# Altium PCB main.PcbDoc
Units mm, origin at the board's own origin, x right, y up, seen from the top; angles counter-clockwise.
Board outline 96.77 x 33.91 mm, 2 copper layers (Top Layer, Bottom Layer); 10 components, 2 nets, 44 pads, 0 vias.
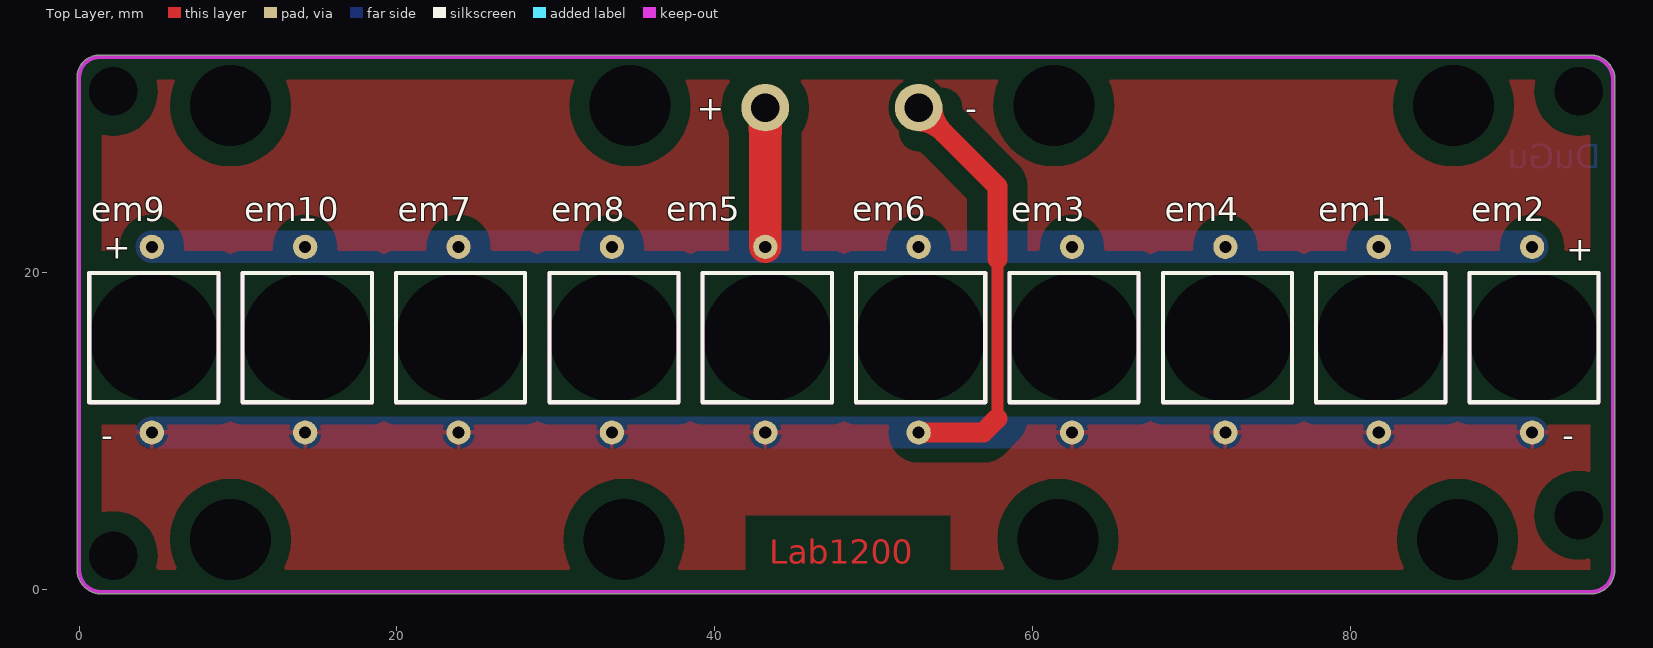
[diagram p0: Top Layer view]
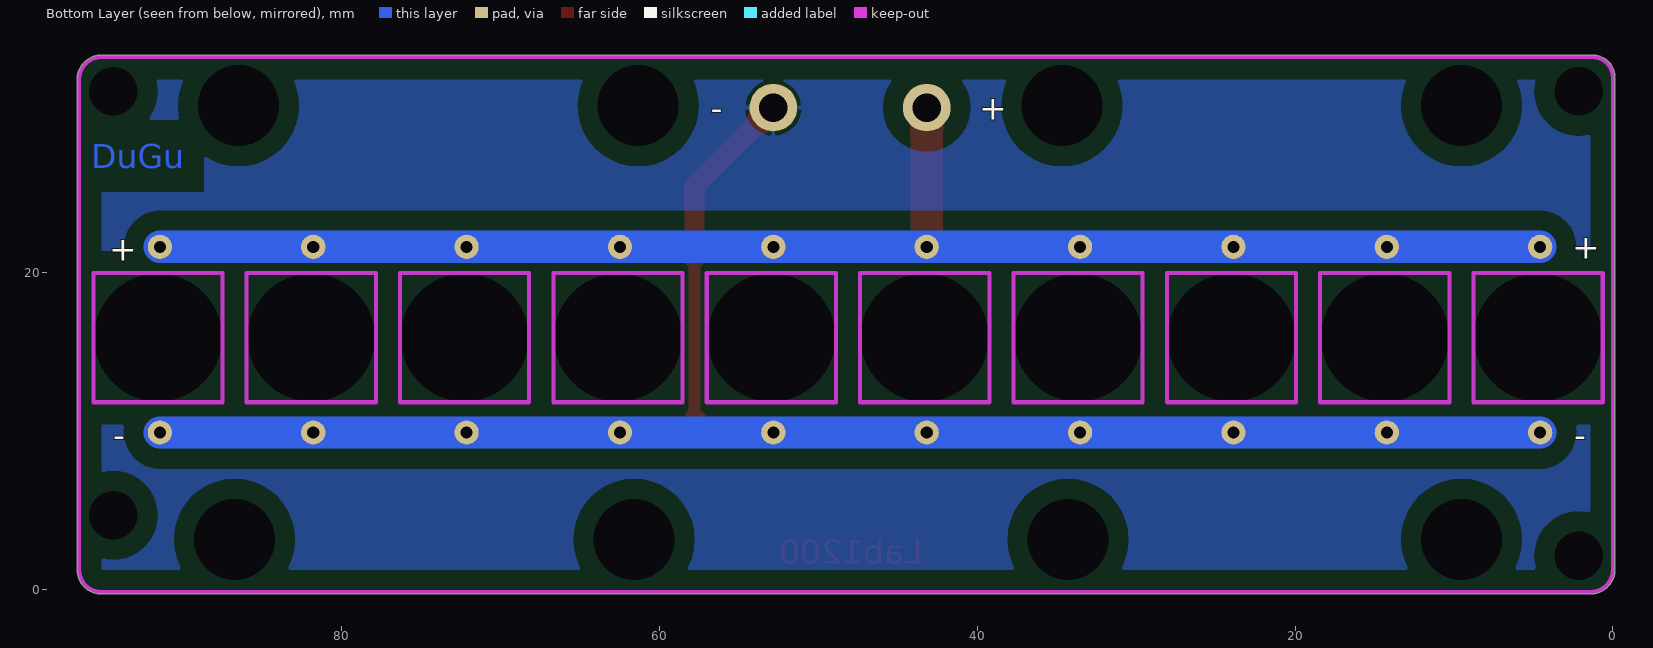
[diagram p1: Bottom Layer view, seen from below]

## Layer stack, top to bottom
Top Solder: solder mask 0.0102, Solder Resist, Dk 3.5
Top Layer: signal copper 0.0356
Dielectric 1: dielectric 0.32, FR-4, Dk 4.8
Bottom Layer: signal copper 0.0356
Bottom Solder: solder mask 0.0102, Solder Resist, Dk 3.5

## Board outline
-0.127,1.27 -0.127,32.258 cw(c1.27,32.258) 1.27,33.655 95.123,33.655 cw(c95.123,32.131) 96.647,32.131 96.647,1.143 cw(c96.52,1.143) 96.637,1.093 cw(c95.123,1.27) 95.123,-0.254 1.397,-0.254 cw(c1.397,1.27)

## Design rules (kind name [scope] priority, off if disabled: settings)
Clearance [All] p1: gap=0.254
PolygonConnect [All] p1: connectstyle=Relief reliefconductorwidth=0.254 reliefentries=4 polygonreliefangle="90 Angle" airgapwidth=0.254
RoutingVias [All] p1: holewidth=0.711 width=1.27 viastyle="Through Hole" minholewidth=0.711 minwidth=1.27 maxholewidth=0.711 maxwidth=1.27
SolderMaskExpansion [All] p1: expansion=0.102
Width [All] p1: maxlimit=2.54 minlimit=0.254 preferedwidth=0.254
30 further rules are at their usual default settings.

## Components (designator, comment, footprint, x,y, rotation, side; value= is the part's Value field where it differs from the comment)
em1 "R1" electromagnet 77.851,11.811 r0 top
em2 "R2" electromagnet 87.503,11.811 r0 top
em3 "R3" electromagnet 58.547,11.811 r0 top
em4 "R4" electromagnet 68.199,11.811 r0 top
em5 "R5" electromagnet 39.243,11.811 r0 top
em6 "R6" electromagnet 48.895,11.811 r0 top
em7 "R7" electromagnet 19.939,11.811 r0 top
em8 "R8" electromagnet 29.591,11.811 r0 top
em9 "R9" electromagnet 0.635,11.811 r0 top
em10 "R10" electromagnet 10.287,11.811 r0 top

## Footprints (in the part's own frame and the unit in brackets; to place one, negate y for a bottom-side part, rotate by r counter-clockwise, add the part's x,y. Pads: shape width x height; smd on the part's side, far side on the other; paste and mask are expansions set on the pad)
electromagnet [mil]
  round 60 hole 30: 1(155,385) 2(155,-75)
  silkscreen extent 0,0 320,320

## Part data
em1 em2 em3 em4 em5 em6 em7 em8 em9 em10: library part electromagnet

## Free pads (board coordinates)
  round 3 hole 1.8: 2(43.18,30.353) 3(52.832,30.353)
  round 1.524 hole 3.05: 4(2.159,2.159) 4(2.159,31.369) 4(94.361,4.699) 4(94.361,31.369)
  round 1.524 hole 8.05: 5(4.699,15.875) 5(14.351,15.875) 5(24.003,15.875) 5(33.655,15.875) 5(43.307,15.875) 5(52.959,15.875) 5(62.611,15.875) 5(72.263,15.875) 5(81.915,15.875) 5(91.567,15.875)
  round 1.524 hole 5.1: 6(9.525,3.175) 6(9.525,30.48) 6(34.29,3.175) 6(34.671,30.48) 6(61.341,30.48) 6(61.595,3.175) 6(86.487,30.48) 6(86.741,3.175)

## Nets (pads, with @x,y where several pads share a name; then routed paths per layer and width w, separated by ;. In a path a pad name is that pad's centre, name@x,y a point inside that pad or via, vN(x,y) a via of type N, cw(c..) or ccw(c..) an arc to the next point about the centre after c; other vN are vias at no path point)
GND: em1.2 em2.2 em3.2 em4.2 em5.2 em6.2 em7.2 em8.2 em9.2 em10.2 pad.3 | length 113.8
  Top Layer w0.762: 57.785,10.795 57.785,20.828
  Top Layer w1.27: em6.2 56.896,9.906 57.785,10.795 ; pad.3 57.785,25.4 57.785,20.828
  Bottom Layer w2.032: em9.2 em10.2 em7.2 em8.2 em5.2 em6.2 em3.2 em4.2 em1.2 em2.2
VCC: em1.1 em2.1 em3.1 em4.1 em5.1 em6.1 em7.1 em8.1 em9.1 em10.1 pad.2 | length 95.6
  Top Layer w2.032: em5.1 pad.2
  Bottom Layer w2.032: em9.1 em10.1 em7.1 em8.1 em5.1 em6.1 em3.1 em4.1 em1.1 em2.1

## Polygon pours and split planes (outlines as drawn)
GND on Top Layer "Top Layer-No Net" (solid, pour order 4): 1.397,-0.127 cw(c1.397,1.27) 0,1.27 0,32.512 cw(c1.016,32.512) 1.016,33.528 1.27,33.528 95.377,33.528 cw(c95.377,32.385) 96.52,32.385 96.52,32.131 96.52,1.27 cw(c95.123,1.27) 95.123,-0.127
GND on Bottom Layer "Top Layer-No Net" (solid, pour order 6): 1.397,-0.127 cw(c1.397,1.27) 0,1.27 0,1.397 0,32.258 cw(c1.27,32.258) 1.27,33.528 95.123,33.528 cw(c95.123,32.131) 96.52,32.131 96.52,31.877 96.52,1.27 cw(c95.123,1.27) 95.123,-0.127

## Keep-outs
Keep-Out Layer:
  lines w0.254: 96.52,1.143 96.52,32.131 ccw(c95.123,32.131) 95.123,33.528 56.388,33.528 38.735,33.528 1.27,33.528 ccw(c1.27,32.258) 0,32.258 0,1.27 ccw(c1.397,1.27) 1.397,-0.127 95.123,-0.127 ccw(c95.123,1.27) 96.52,1.27 ; 0.635,11.811 8.763,11.811 ; 0.635,11.811 0.635,19.939 8.763,19.939 8.763,11.811 ; 0.635,11.811 8.763,11.811 ; 10.287,11.811 18.415,11.811 ; 10.287,11.811 10.287,19.939 18.415,19.939 18.415,11.811 ; 10.287,11.811 18.415,11.811 ; 19.939,11.811 28.067,11.811 ; 19.939,11.811 19.939,19.939 28.067,19.939 28.067,11.811 ; 19.939,11.811 28.067,11.811 ; 29.591,11.811 37.719,11.811 ; 29.591,11.811 29.591,19.939 37.719,19.939 37.719,11.811 ; 29.591,11.811 37.719,11.811 ; 39.243,11.811 47.371,11.811 ; 39.243,11.811 39.243,19.939 47.371,19.939 47.371,11.811 ; 39.243,11.811 47.371,11.811 ; 48.895,11.811 57.023,11.811 ; 48.895,11.811 48.895,19.939 57.023,19.939 57.023,11.811 ; 48.895,11.811 57.023,11.811 ; 58.547,11.811 66.675,11.811 ; 58.547,11.811 58.547,19.939 66.675,19.939 66.675,11.811 ; 58.547,11.811 66.675,11.811 ; 68.199,11.811 76.327,11.811 ; 68.199,11.811 68.199,19.939 76.327,19.939 76.327,11.811 ; 68.199,11.811 76.327,11.811 ; 77.851,11.811 85.979,11.811 ; 77.851,11.811 77.851,19.939 85.979,19.939 85.979,11.811 ; 77.851,11.811 85.979,11.811 ; 87.503,11.811 95.631,11.811 ; 87.503,11.811 87.503,19.939 95.631,19.939 95.631,11.811 ; 87.503,11.811 95.631,11.811

## Other copper
Top Layer:
  text "Lab1200" at 43.434,1.651 h1.52
Bottom Layer:
  text "DuGu" at 95.758,26.543 h1.52

## Silkscreen, mask and mechanical layers (free items; w line width, h text height)
Top Overlay:
  text "+" at 38.862,29.591 h1.52
  text "-" at 55.753,29.591 h1.52
  text "+" at 1.524,20.828 h1.52
  text "+" at 93.599,20.701 h1.52
  text "-" at 1.397,9.017 h1.52
  text "-" at 93.345,9.017 h1.52
Bottom Overlay:
  text "+" at 39.878,29.591 h1.52
  text "-" at 56.769,29.591 h1.52
  text "+" at 2.54,20.828 h1.52
  text "+" at 94.615,20.701 h1.52
  text "-" at 2.413,9.017 h1.52
  text "-" at 94.361,9.017 h1.52
Top Solder:
  lines w0.762: 57.785,10.795 57.785,20.828
  lines w1.27: 52.832,9.906 56.896,9.906 57.785,10.795 ; 52.832,30.353 57.785,25.4 57.785,20.828
  lines w2.032: 43.18,21.59 43.18,30.353
  text "Lab1200" at 43.434,1.651 h1.52
Bottom Solder:
  lines w2.032: 4.572,9.906 14.224,9.906 23.876,9.906 33.528,9.906 43.18,9.906 52.832,9.906 62.484,9.906 72.136,9.906 81.788,9.906 91.44,9.906 ; 4.572,21.59 14.224,21.59 23.876,21.59 33.528,21.59 43.18,21.59 52.832,21.59 62.484,21.59 72.136,21.59 81.788,21.59 91.44,21.59
  text "DuGu" at 95.758,26.543 h1.52